# EAGLE board TZATZIKI_v3 (EAGLE 7.6.0)
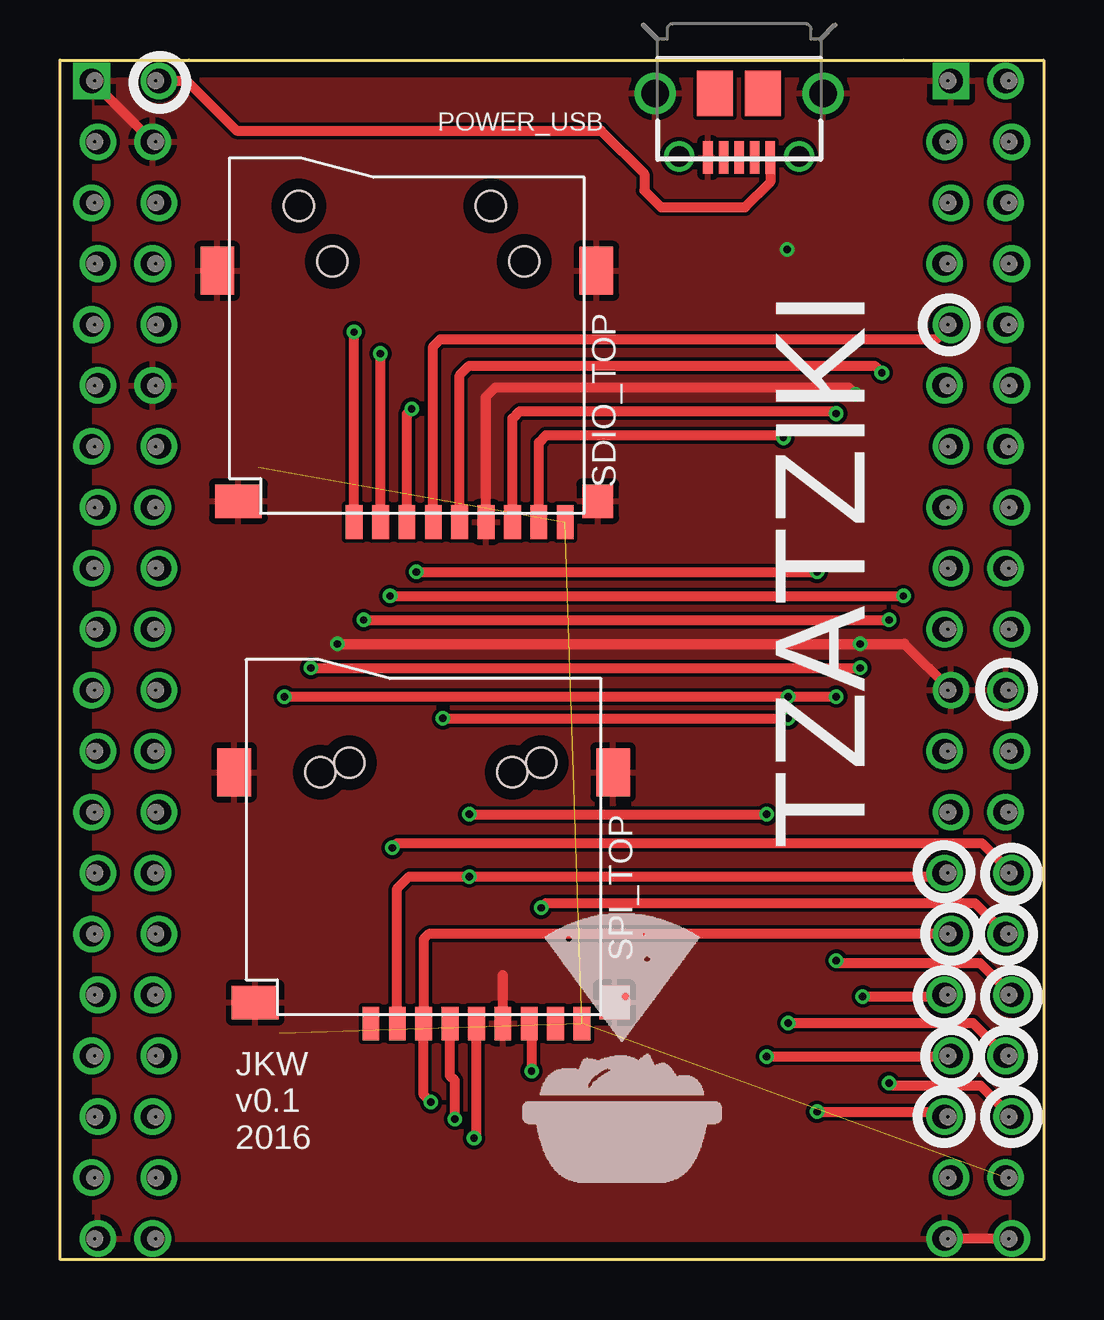
[diagram p0: board, top side]
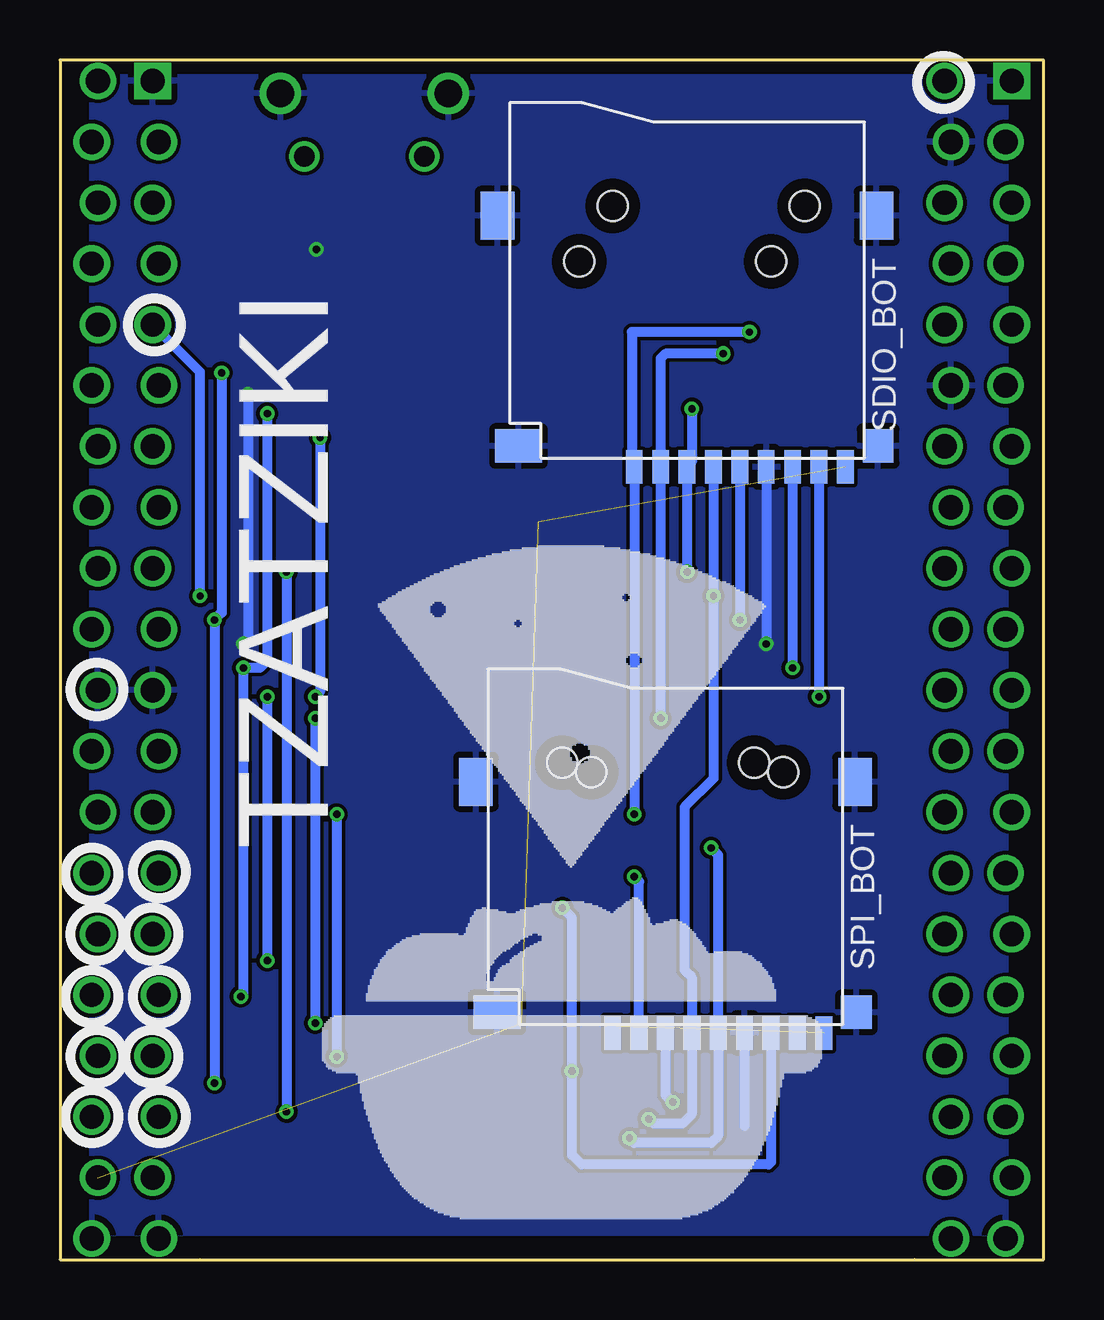
[diagram p1: board, bottom side, seen from below]

Size 41 x 50 mm. Coordinates in mm from the lower left corner, seen from the top.
Copper layers (1*16): Top 0.035mm / dielectric 1.6mm / Bottom 0.035mm
Design rules "Elecrow_2-layer_PCB_eagle_rule": minimum track width 6mil, minimum drill 12mil, track to track 6mil, track to pad 6mil, pad to pad 6mil, via to via 8mil, smd to smd 0mil, copper to edge 20mil, drill to drill 10mil, minimum pad ring 6mil, minimum via ring 6mil, stop-mask expansion 0mil, vias tented up to drill 100mil, thermal gap 10mil

## Footprints (pad centres in the part's own frame; a part is rotated, then mirrored left to right if it is on the bottom)
2X20CHIP_OFFSET-TH = drill 1.016: AP-EINT1 15.113,-3.81; AP-EINT3 17.907,-3.81; BAT -17.907,16.51; CHG-IN -17.653,24.13; CSICK 17.907,-8.89; CSID0 15.113,-13.97; CSID1 17.907,-13.97; CSID2 15.367,-16.51; CSID3 17.653,-16.51; CSID4 15.113,-19.05; CSID5 17.907,-19.05; CSID6 15.367,-21.59; CSID7 17.653,-21.59; CSIHSYNC 15.367,-11.43; CSIPCK 15.113,-8.89; CSIVSYNC 17.653,-11.43; FEL 15.113,16.51; GND@1 -17.907,11.43; GND@2 -20.193,-24.13; GND@4 17.653,-1.27; GND@5 17.907,-24.13; GND@6 15.113,-24.13; GND@7 15.367,-1.27; GND@10 -17.907,21.59; HPCOM 17.653,19.05; HPL 17.907,21.59; HPR 17.907,16.51; LCD-CLK -20.193,-19.05; LCD-D2 -20.447,3.81; LCD-D3 -17.907,1.27; LCD-D4 -20.193,1.27; LCD-D5 -17.653,-1.27; LCD-D6 -20.447,-1.27; LCD-D7 -17.907,-3.81; LCD-D10 -20.193,-3.81; LCD-D11 -17.653,-6.35; LCD-D12 -20.447,-6.35; LCD-D13 -17.907,-8.89; LCD-D14 -20.193,-8.89; LCD-D15 -17.653,-11.43; LCD-D18 -20.447,-11.43; LCD-D19 -17.907,-13.97; LCD-D20 -20.193,-13.97; LCD-D21 -17.653,-16.51; LCD-D22 -20.447,-16.51; LCD-D23 -17.907,-19.05; LCD-DE -17.907,-24.13; LCD-HSYNC -17.653,-21.59; LCD-VSYNC -20.447,-21.59; LRADC 15.113,11.43; MICIN1 17.907,11.43; MICM 17.653,13.97; PWM0 -17.653,3.81; PWRON -17.653,13.97; TS -17.653,19.05; TWI1-SCK -20.193,11.43; TWI1-SDA -20.447,13.97; TWI2-SCK 17.653,-6.35; TWI2-SDA 15.367,-6.35; UART1-RX 15.367,19.05; UART1-TX 15.113,21.59; VCC1V8 -20.193,16.51; VCC3V3 -20.447,19.05; VCC3V3@1 15.367,13.97; VCC5V@0 -20.193,21.59; VCC5V@1 17.653,24.13; X1 -20.447,8.89; X2 -17.653,8.89; XIO-P0 15.367,8.89; XIO-P1 17.653,8.89; XIO-P2 15.113,6.35; XIO-P3 17.907,6.35; XIO-P4 15.367,3.81; XIO-P5 17.653,3.81; XIO-P6 15.113,1.27; XIO-P7 17.907,1.27; Y1 -20.193,6.35; Y2 -17.907,6.35 | drill 1.016 square: GND@3 -20.447,24.13; GND@8 15.367,24.13
USB-MICROB-SMT-DIP = smd 0.4 x 1.35: D+ 0,2.675; D- -0.65,2.675; GND 1.3,2.675; ID 0.65,2.675; VBUS -1.3,2.675 | drill 1.15 pad 1.7: MT1 -3.5,0; MT2 3.5,0 | drill 0.85 pad 1.25: MT3 -2.5,2.625; MT4 2.5,2.625 | smd 1.5 x 1.9: P$1 -1,0; P$2 1,0.01
TF-PULL = smd 0.7 x 1.4: 1 -2.2,-7.62; 2 -1.1,-7.62; 3 0,-7.62; 4 1.1,-7.62; 5 2.2,-7.62; 6 3.3,-7.62; 7 4.4,-7.62; 8 5.5,-7.62; 9 6.6,-7.62 | smd 1.4 x 2: S1 -7.9,2.85; S2 7.9,2.85 | smd 1.28 x 1.4: S3 7.96,-6.75 | smd 1.95 x 1.4: S4 -7.025,-6.75 | hole 1.25: -3.1,3.25; 4.9,3.25

## Placement (x,y rotation side)
J1  2X20-CHIP-HEADERS2X20CHIP_OFFSET-TH  [2X20CHIP_OFFSET-TH]  21.77,25 0 top
POWER_USB  USBUSB-MICROB-SMT-DIP  [USB-MICROB-SMT-DIP]  28.31,48.61 180 top
SDIO_BOT  TF-HOLDER  [TF-PULL]  14.86,40.66 0 bottom
SDIO_TOP  TF-HOLDER  [TF-PULL]  14.46,38.36 0 top
SPI_BOT  TF-HOLDER  [TF-PULL]  15.76,17.06 0 bottom
SPI_TOP  TF-HOLDER  [TF-PULL]  15.16,17.46 0 top
U$1  LOGO_10X10_SILK  [LOGO_10X10_SILK]  19.26,3.19 0 top
U$2  LOGO_25X25_SILK  [LOGO_25X25_SILK]  30.11,1.64 0 bottom

## Library data of the parts
J1 SDIO_BOT SDIO_TOP SPI_BOT SPI_TOP U$1 U$2 = JKW_CHIP
POWER_USB = Spark

## Nets
GND: J1.GND@1 J1.GND@2 J1.GND@3 J1.GND@4 J1.GND@5 J1.GND@6 J1.GND@7 J1.GND@8 J1.GND@10 POWER_USB.GND POWER_USB.MT1 POWER_USB.MT2 SDIO_BOT.6 SDIO_BOT.S1 SDIO_BOT.S2 SDIO_BOT.S3 SDIO_BOT.S4 SDIO_TOP.6 SDIO_TOP.S1 SDIO_TOP.S2 SDIO_TOP.S3 SDIO_TOP.S4 SPI_BOT.6 SPI_BOT.S1 SPI_BOT.S2 SPI_BOT.S3 SPI_BOT.S4 SPI_TOP.6 SPI_TOP.S1 SPI_TOP.S2 SPI_TOP.S3 SPI_TOP.S4
N$2: J1.CSID3 SDIO_BOT.2 SDIO_TOP.2
N$3: J1.CSID0 SDIO_BOT.7 SDIO_TOP.7
N$4: J1.CSID4 SDIO_BOT.3 SDIO_TOP.3
N$5: J1.CSID5 SDIO_BOT.5 SDIO_TOP.5
N$6: J1.CSID1 SDIO_BOT.8 SDIO_TOP.8
N$7: J1.VCC5V@1
N$8: J1.VCC5V@0
N$9: J1.CSID2 SDIO_BOT.1 SDIO_TOP.1
N$10: J1.VCC3V3@1 SDIO_BOT.4 SDIO_TOP.4 SPI_BOT.4 SPI_TOP.4
N$11: J1.CSIPCK SPI_BOT.2 SPI_TOP.2
N$12: J1.CSIHSYNC SPI_BOT.3 SPI_TOP.3
N$13: J1.CSIVSYNC SPI_BOT.7 SPI_TOP.7
N$14: J1.CSICK SPI_BOT.5 SPI_TOP.5
N$16: J1.CSID7 SDIO_BOT.9 SDIO_TOP.9 SPI_BOT.9 SPI_TOP.9
VCC3V3: J1.VCC3V3
VCC-1V8: J1.VCC1V8
VOUT: J1.CHG-IN POWER_USB.VBUS

## Tracks (layer width: path | path; a pad name or v marks a point on that pad's centre or on a via)
GND  (via drill 0.3)
  Top 0.406: J1.GND@3 J1.GND@10 | J1.GND@5 J1.GND@6 | v11.56,25.66 v33.36,25.66 35.21,25.66 J1.GND@7 | SDIO_TOP.6 17.76,35.96 18.16,36.36 32.86,36.36 v33.16,36.06 | SPI_TOP.6 18.46,11.86
  Bottom 0.406: SDIO_BOT.6 v11.56,25.66 | v33.16,36.06 33.16,25.86 v33.36,25.66 | SPI_BOT.6 12.46,5.56
  other vias: 30.31,42.11
  pour Top: 1.45,0.87 39.55,0.87 39.55,49.13 1.45,49.13
  pour Bottom: 39.67,1.12 1.57,1.12 1.57,49.38 39.67,49.38
N$2  (via drill 0.3)
  Top 0.406: v15.96,22.56 v30.36,22.56 | v30.36,9.86 38.05,9.86 J1.CSID3 | SDIO_TOP.2 v13.36,37.76
  Bottom 0.406: v15.96,22.56 SDIO_BOT.2 15.96,37.56 15.76,37.76 v13.36,37.76 | v30.36,22.56 v30.36,9.86
N$3  (via drill 0.3)
  Top 0.406: v10.46,24.66 v33.36,24.66 | v33.46,10.96 36.81,10.96 J1.CSID0 | SDIO_TOP.7 18.86,35.06 19.16,35.36 32.26,35.36 v32.36,35.26
  Bottom 0.406: SDIO_BOT.7 v10.46,24.66 | v33.46,10.96 33.36,11.06 v33.36,24.66 32.66,24.66 32.36,24.96 v32.36,35.26
N$4  (via drill 0.3)
  Top 0.406: v14.86,28.66 v31.56,28.66 | v31.56,6.16 36.67,6.16 J1.CSID4 | SDIO_TOP.3 14.46,35.26 v14.66,35.46
  Bottom 0.406: v14.86,28.66 SDIO_BOT.3 14.66,33.24 v14.66,35.46 | v31.56,28.66 v31.56,6.16
N$5  (via drill 0.3)
  Top 0.406: v12.66,26.66 v34.56,26.66 | v34.56,7.36 34.66,7.26 38.37,7.26 J1.CSID5 | SDIO_TOP.5 16.66,36.86 17.06,37.26 33.96,37.26 v34.26,36.96
  Bottom 0.406: SDIO_BOT.5 v12.66,26.66 | v34.56,7.36 v34.56,26.66 34.26,26.96 v34.26,36.96
N$6  (via drill 0.3)
  Top 0.406: v9.36,23.46 v30.36,23.46 31.36,23.46 v32.36,23.46 | v32.36,12.46 32.46,12.36 38.35,12.36 J1.CSID1 | SDIO_TOP.8 19.96,34.06 20.26,34.36 30.06,34.36 v30.16,34.26
  Bottom 0.406: SDIO_BOT.8 v9.36,23.46 | v32.36,23.46 v32.36,12.46 | v30.16,34.26 30.16,23.66 v30.36,23.46
N$9  (via drill 0.3)
  Top 0.406: v17.06,18.56 v29.46,18.56 | v29.46,8.46 37.11,8.46 J1.CSID2 | SDIO_TOP.1 v12.26,38.66
  Bottom 0.406: v17.06,18.56 SDIO_BOT.1 17.16,33.14 17.16,38.66 v12.26,38.66 | v29.46,18.56 v29.46,8.46
N$10  (via drill 0.3)
  Top 0.406: v13.76,27.66 v35.16,27.66 | SDIO_TOP.4 15.56,38.06 15.86,38.36 36.53,38.36 J1.VCC3V3@1 | v16.46,5.86 16.46,7.46 16.26,7.66 SPI_TOP.4
  Bottom 0.406: 37,39.11 J1.VCC3V3@1 35.16,36.99 v35.16,27.66 | SDIO_BOT.4 v13.76,27.66 13.76,20.06 14.96,18.86 14.96,12.06 14.66,11.76 SPI_BOT.4 14.66,6.06 15.06,5.66 16.26,5.66 v16.46,5.86
N$11  (via drill 0.3)
  Top 0.406: SPI_TOP.2 14.06,15.46 14.56,15.96 v17.06,15.96 18.26,15.96 36.73,15.96 J1.CSIPCK
  Bottom 0.406: SPI_BOT.2 16.86,15.76 v17.06,15.96
N$12  (via drill 0.3)
  Top 0.406: J1.CSIHSYNC 15.37,13.57 15.16,13.36 SPI_TOP.3 15.16,6.86 v15.46,6.56
  Bottom 0.406: SPI_BOT.3 15.76,6.86 v15.46,6.56
N$13  (via drill 0.3)
  Top 0.406: J1.CSIVSYNC 38.13,14.86 20.26,14.86 v20.06,14.66 | SPI_TOP.7 19.66,9.74 v19.66,7.86
  Bottom 0.406: v20.06,14.66 19.66,14.26 19.66,11.76 v19.66,7.86 19.66,4.36 19.26,3.96 11.46,3.96 11.36,4.06 SPI_BOT.7
N$14  (via drill 0.3)
  Top 0.406: v13.86,17.16 14.06,17.36 38.43,17.36 J1.CSICK | v17.26,5.06 17.36,5.16 SPI_TOP.5
  Bottom 0.406: v13.86,17.16 13.56,16.86 SPI_BOT.5 13.56,5.16 13.86,4.86 17.06,4.86 v17.26,5.06
N$16  (4 unrouted)
VOUT
  Top 0.406: POWER_USB.VBUS 29.61,44.91 28.56,43.86 25.06,43.86 24.36,44.56 24.36,45.26 22.56,47.06 7.36,47.06 5.29,49.13 J1.CHG-IN

## Text on the board
Unrouted: Not Ordered
tNames: TZATZIKI | JKW / v0.1 / 2016
bNames: TZATZIKI